# EAGLE board shieldv2 (EAGLE 8.7.0)
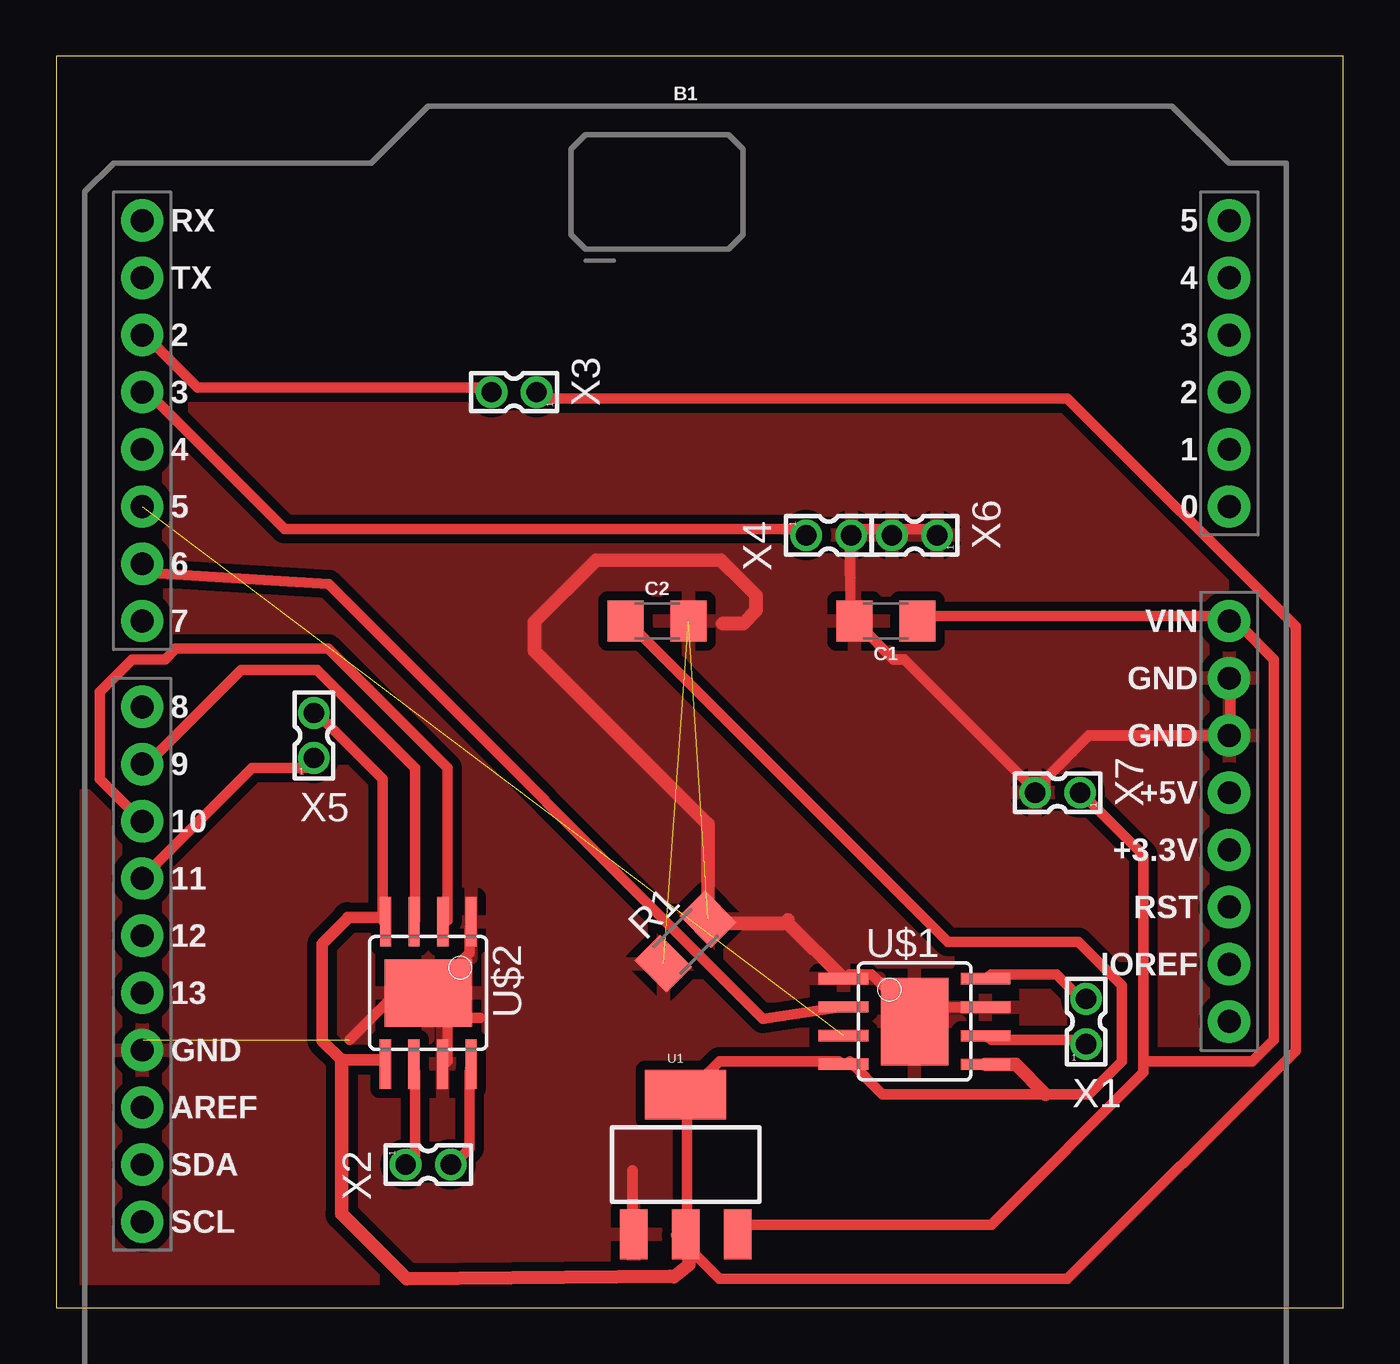
[diagram p0: board, top side]

Size 57.13 x 55.55 mm. Coordinates in mm from the lower left corner, seen from the top.
Outline: 0,0 57.13,0 57.13,55.55 0,55.55 0,0
Copper layers (1*16): Top 0.035mm / dielectric 1.5mm / Bottom 0.035mm
Design rules "default *": minimum track width 18mil, minimum drill 0.35mm, track to track 16mil, track to pad 16mil, pad to pad 16mil, via to via 16mil, smd to smd 16mil, copper to edge 40mil, drill to drill 6mil, minimum pad ring 10mil, minimum via ring 8mil, stop-mask expansion 4mil, vias tented up to drill 0mil, thermal gap 16mil

## Footprints (pad centres in the part's own frame; a part is rotated, then mirrored left to right if it is on the bottom)
UNO_R3_SHIELD = drill 1.016 pad 1.88: 3.3V 24.13,-2.54; 5V 24.13,0; A0 24.13,12.7; A1 24.13,15.24; A2 24.13,17.78; A3 24.13,20.32; A4 24.13,22.86; A5 24.13,25.4; AREF -24.13,-13.97; D2 -24.13,20.32; D3 -24.13,17.78; D4 -24.13,15.24; D5 -24.13,12.7; D6 -24.13,10.16; D7 -24.13,7.62; D8 -24.13,3.81; D9 -24.13,1.27; D10 -24.13,-1.27; D11 -24.13,-3.81; D12 -24.13,-6.35; D13 -24.13,-8.89; GND@0 24.13,2.54; GND@1 24.13,5.08; GND@2 -24.13,-11.43; IOREF 24.13,-7.62; NC 24.13,-10.16; RES 24.13,-5.08; RX -24.13,25.4; SCL -24.13,-19.05; SDA -24.13,-16.51; TX -24.13,22.86; VIN 24.13,7.62
1206 = smd 1.6 x 1.8: 1 -1.4,0; 2 1.4,0
M1206 = smd 1.6 x 2: 1 -1.4,0; 2 1.4,0
SOT223 = smd 1.219 x 2.235: 1 -2.311,-3.099; 2 0,-3.099; 3 2.311,-3.099 | smd 3.6 x 2.2: 4 0,3.099
SOIC8_PAD = smd 0.5 x 2.2: 1 -1.905,-3.154; 2 -0.645,-3.154; 3 0.625,-3.154; 4 1.895,-3.154; 5 1.905,3.154; 6 0.635,3.154; 7 -0.635,3.154; 8 -1.905,3.154 | smd 3.886 x 2.997: GND 0,0
332-02 = drill 0.9 pad 1.27: 1 0,-1; 2 0,1

## Placement (x,y rotation side)
B1  ARDUINO_UNO_R3_SHIELDBASIC  [UNO_R3_SHIELD]  27.94,22.86 0 top
C1  10uF  [1206]  36.83,30.48 180 top
C2  10uF  [1206]  26.67,30.48 0 top
R1  [M1206]  27.94,16.26 45 top
U1  [SOT223]  27.94,6.35 0 top
U$1  A4953-H-BRIDGE-MOTOR-DRIVER-PAD  [SOIC8_PAD]  38.1,12.7 270 top
U$2  A4953-H-BRIDGE-MOTOR-DRIVER-PAD  [SOIC8_PAD]  16.51,13.97 180 top
X1  332-02  [332-02]  45.72,12.7 0 top
X2  332-02  [332-02]  16.51,6.35 270 top
X3  332-02  [332-02]  20.32,40.64 90 top
X4  332-02  [332-02]  34.29,34.29 270 top
X5  332-02  [332-02]  11.43,25.4 0 top
X6  332-02  [332-02]  38.1,34.29 90 top
X7  332-02  [332-02]  44.45,22.86 90 top

## Library data of the parts
B1 = SparkFun-Boards
C1 C2 = SparkFun-Capacitors; PROD_ID: CAP-10057
R1 = rcl; SPICEPREFIX: R
U1 = fab; PROD_ID: VREG-08170
U$1 U$2 = fab
X1-X7 = con-garry

## Nets
+5V: C2.1 U1.2 U1.4 U$1.4 U$1.5 X3.1
N$1: B1.GND@0 B1.GND@1 B1.GND@2 C1.2 C2.2 R1.1 R1.2 U1.1 U$1.1 U$1.7 U$1.GND U$2.1 U$2.7 U$2.GND X4.2 X6.1 X6.2 X7.2
N$2: B1.D6 U$1.2
N$3: U$1.8 X1.2
N$4: B1.D10 U$2.2
N$5: U$1.6 X1.1
N$6: U$2.8 X2.2
N$7: U$2.6 X2.1
N$8: B1.D5 U$1.3
N$9: B1.D3 X4.1
N$10: B1.D2 X3.2
N$11: B1.D11 X5.1
N$12: B1.D13
N$13: B1.D9 U$2.3
S$2: U$2.4 U$2.5 X5.2
VCC: B1.VIN C1.1 U1.3 X7.1

## Tracks (layer width: path | path; a pad name or v marks a point on that pad's centre or on a via)
+5V
  Top 0.457: C2.1 25.58,30.23 39.57,16.23 45.36,16.23 47.3,14.3 47.3,10.92 45.85,9.47 43.92,9.47 36.68,9.47 35.23,10.92 U$1.4 34.75,10.92 29.44,10.92 27.99,9.47 U1.4 27.99,8.99 27.99,3.68 U1.2 27.51,3.2 29.44,1.27 44.88,1.27 55.02,11.4 55.02,30.23 44.88,40.36 21.72,40.36 X3.1
  Top 0.61: U$1.5 42.6,10.79 43.92,9.47
N$1  (3 unrouted)
  Top 0.457: 37.64,13.33 38.12,12.85 U$1.GND 37.64,13.33 | 37.64,13.33 36.2,14.78 35.23,14.78 U$1.1 | 37.64,13.33 U$1.7 | B1.GND@1 52.12,27.81 52.12,25.4 B1.GND@0 45.85,25.4 43.92,23.47 43.92,22.99 X7.2 43.43,22.99 37.64,28.78 37.16,28.78 35.71,30.23 C1.2 35.26,30.84 35.23,34.09 X4.2 35.71,34.57 36.68,34.57 X6.2 37.16,34.57 39.09,34.57 X6.1 | 28.47,30.71 C2.2 | 17.37,12.85 17.37,13.33 16.89,13.82 U$2.GND | 17.37,12.85 17.37,10.92 U$2.7 | U$2.1 18.34,16.71 18.34,15.75 16.89,14.3 U$2.GND | 25.58,6.1 25.58,3.68 U1.1 | 17.37,12.85 18.82,12.85 | 17.37,12.85 U$2.GND | 13.03,11.89 14.96,13.82 16.41,13.82 U$2.GND | 3.86,11.89 B1.GND@2
  Top 0.508: 26.95,14.76 R1.1
  Top 0.61: U$1.1 32.49,17.06 | 32.49,17.06 32.49,17.22 | 32.49,17.06 29.11,17.06 R1.2 28.93,21.46 28.83,21.57 21.23,29.16 21.23,30.45 23.98,33.2 29.49,33.2 30.53,32.16 30.8,31.89 31.06,31.62 31.06,30.94 30.5,30.38 29.58,30.38
  pour Top: 0.25,55.12 0.25,-1.52 -0.25,-2.03 57.66,-2.03 58.17,-2.54 58.17,54.86 0.51,54.86
N$2
  Top 0.457: U$1.2 34.75,13.33 31.37,12.83 12.09,32.13 3.86,32.64 B1.D6
N$3
  Top 0.457: U$1.8 41.5,14.78 44.4,14.78 45.36,13.82 X1.2
N$4
  Top 0.457: B1.D10 1.93,23.47 1.93,27.33 3.38,28.78 4.83,28.78 5.31,29.26 12.06,29.26 17.37,23.95 17.37,17.2 U$2.2
N$5
  Top 0.457: U$1.6 41.5,11.89 45.36,11.89 X1.1
N$6
  Top 0.457: U$2.8 18.34,10.44 18.34,7.06 17.86,6.58 X2.2
N$7
  Top 0.457: U$2.6 15.93,10.44 15.93,6.58 X2.1
N$8  (1 unrouted)
N$9
  Top 0.457: X4.1 32.82,34.57 10.13,34.57 3.86,40.84 B1.D3
N$10
  Top 0.457: X3.2 19.3,40.84 6.27,40.84 3.86,43.26 B1.D2
N$11
  Top 0.457: X5.1 11.1,23.95 8.69,23.95 3.86,19.13 B1.D11
N$13
  Top 0.457: U$2.3 15.93,17.2 15.93,23.95 11.58,28.3 8.2,28.3 3.86,23.95 B1.D9
S$2
  Top 0.457: X5.2 11.58,26.36 14.48,23.47 14.48,17.2 U$2.4
  Top 0.508: U$2.4 14.42,17.32 12.93,17.32 12.93,17.27 11.81,16.15 11.81,11.85 12.66,11 14.42,11 U$2.5
  Top 0.61: 12.66,11 12.66,4.15 15.54,1.27 27.25,1.4 27.43,1.37 28.09,1.91 28.09,3.83 28.02,3.91
VCC
  Top 0.457: C1.1 38.61,30.71 51.64,30.71 B1.VIN 52.12,30.23 52.6,30.23 54.05,28.78 54.05,11.89 53.09,10.92 48.26,10.92 | 48.26,10.92 48.26,20.09 45.85,22.5 X7.1 | 48.26,10.92 48.26,10.44 41.5,3.68 30.4,3.68 U1.3